# EAGLE board SparkFun_LilyPad_Main_Board-Panel-v21 (EAGLE 7.4.0), part 1 of 2
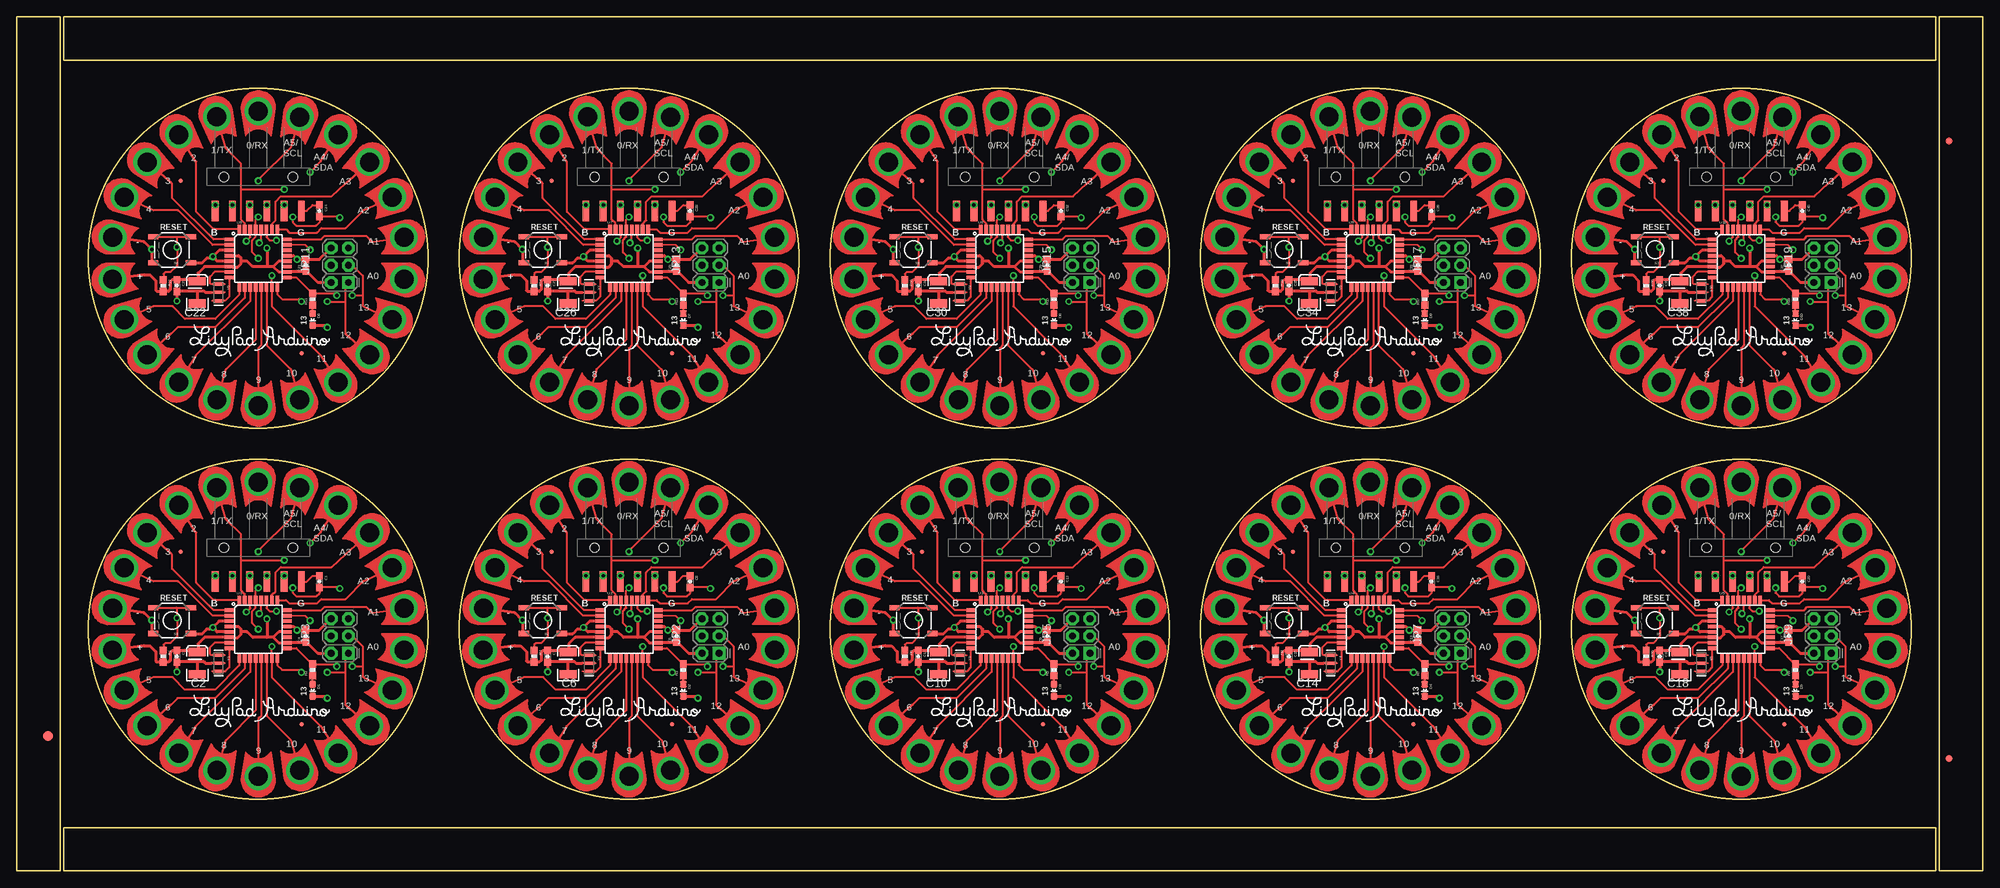
[diagram p0: board, top side]
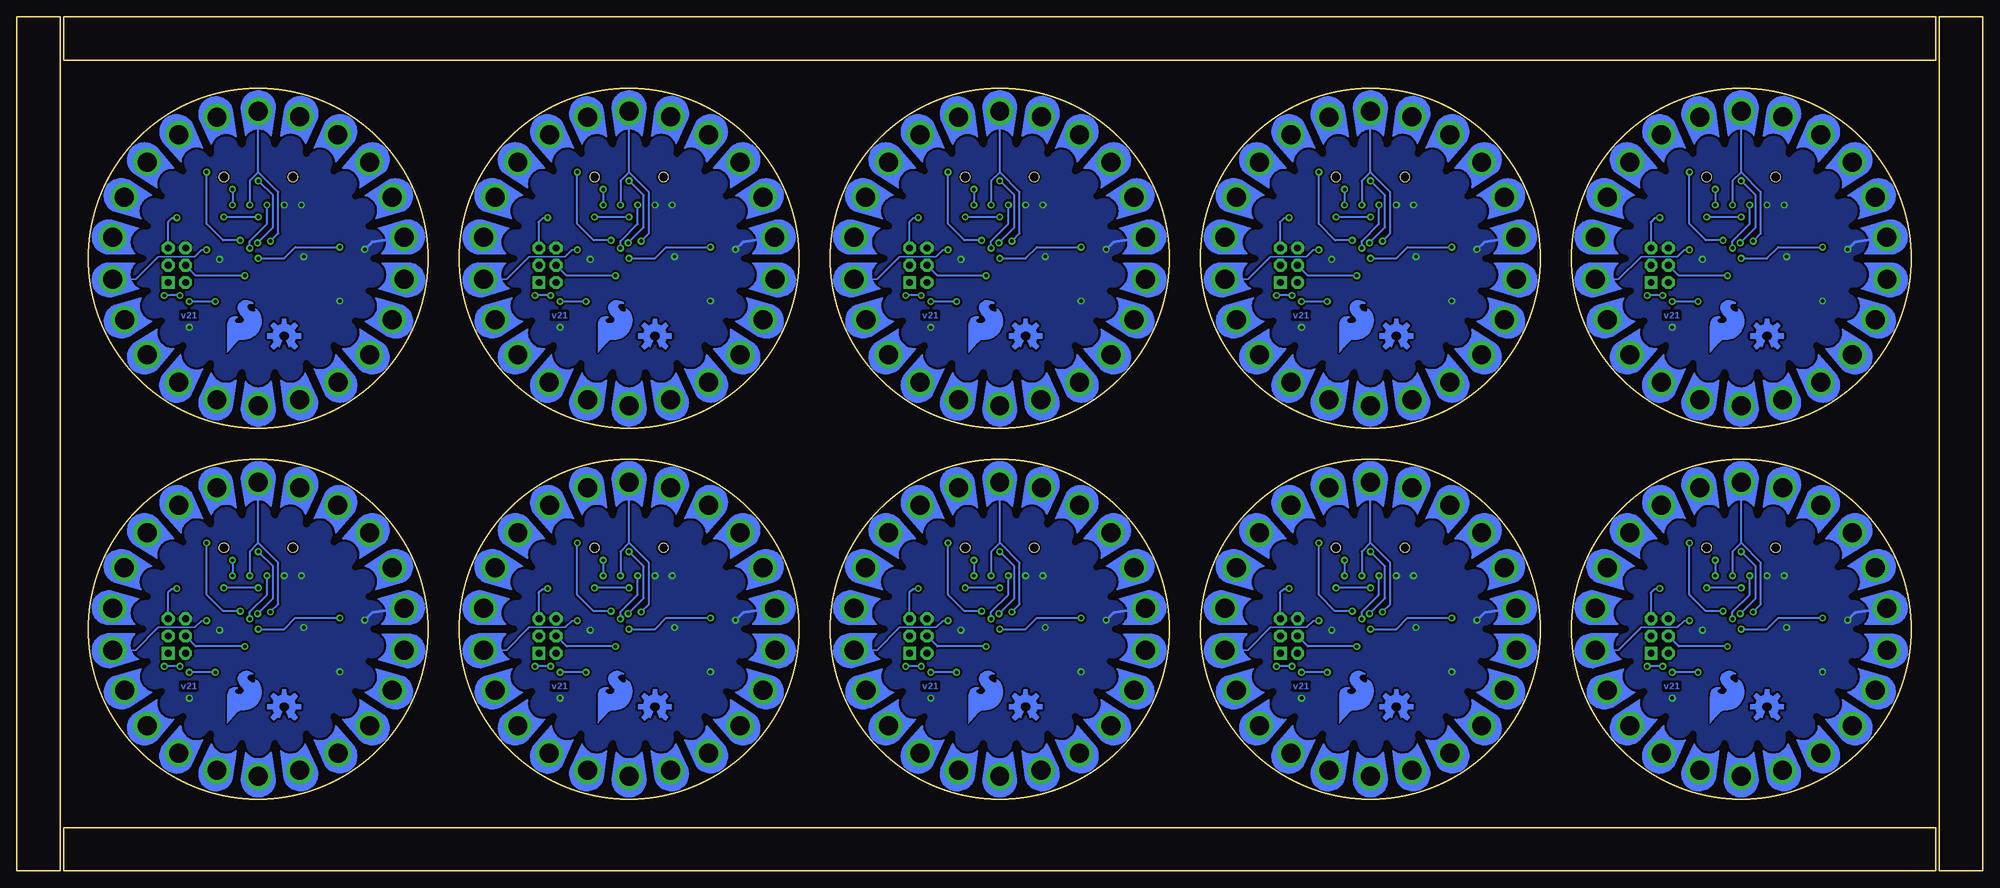
[diagram p1: board, bottom side, seen from below]

Size 289.56 x 125.73 mm. Coordinates in mm from the lower left corner, seen from the top.
Outline: 6.35,81.28 6.35,0 0,0 0,31.75
Outline: 0,29.21 0,125.73 6.35,125.73 6.35,78.74
Outline: 80.01,0 6.86,0 6.86,6.35 30.48,6.35
Outline: 27.94,6.35 282.7,6.35 282.7,0 77.47,0
Outline: 208.28,125.73 282.7,125.73 282.7,119.38 257.81,119.38
Outline: 260.35,119.38 6.86,119.38 6.86,125.73 210.82,125.73
Outline: 283.21,45.72 283.21,125.73 289.56,125.73 289.56,95.25
Outline: 289.56,97.79 289.56,0 283.21,0 283.21,48.26
Outline: circle at 35.56,35.56 radius 25
Outline: circle at 90.17,35.56 radius 25
Outline: circle at 144.78,35.56 radius 25
Outline: circle at 199.39,35.56 radius 25
Outline: circle at 254,35.56 radius 25
Outline: circle at 35.56,90.17 radius 25
Outline: circle at 90.17,90.17 radius 25
Outline: circle at 144.78,90.17 radius 25
Outline: circle at 199.39,90.17 radius 25
Outline: circle at 254,90.17 radius 25
Copper layers (1*16): Top 0.035mm / dielectric 1.5mm / Bottom 0.035mm
Design rules "SparkFun-2-layer": minimum track width 7mil, minimum drill 15mil, track to track 8mil, track to pad 8mil, pad to pad 8mil, via to via 8mil, smd to smd 8mil, copper to edge 8mil, drill to drill 8mil, minimum pad ring 12mil, minimum via ring 10mil, stop-mask expansion 4mil, vias tented up to drill 20mil, thermal gap 10mil
Net classes: 0 Default: width 0.203 mm; 1 VCC: width 0.305 mm
bRestrict: area 13,13 to 58.1,58.1; area 31.6,53.4 to 34.1,54.6; area 42.2,51.9 to 45,53.6; area 46.9,49 to 49.5,51.3; area 50.6,44.7 to 52.6,47.5; area 52.8,39.8 to 54.2,42.4; area 53.4,34.5 to 54.6,36.8; area 52.8,28.8 to 54.3,31.5; area 46.9,20 to 49.6,22.3; area 42.3,17.6 to 45.1,19.3; area 37.1,16.6 to 39.5,17.9; area 31.7,16.6 to 34.2,17.9; 218 more areas; 220 lines

## Footprints (pad centres in the part's own frame; a part is rotated, then mirrored left to right if it is on the bottom)
0603-CAP = smd 1.1 x 1: 1 -0.85,0; 2 0.85,0
EIA3528 = smd 1.2 x 2.5: A 1.65,0; C -1.65,0
LED-0603 = smd 1 x 1: A 0,-0.877; C 0,0.877
FIDUCIAL-1.5X3 = smd 1.5 x 1.5: 1 0,0
FIDUCIAL-1X2 = smd 1 x 1: 1 0,0
MICRO-FIDUCIAL = smd 0.635 x 0.635: 1 0,0
PETAL-LONG-1-2SIDE = drill 2.794 pad 4.064: 1 0.03,0
1X06-SMD = smd 1 x 3: 1 -6.35,5; 2 -3.81,5; 3 -1.27,5; 4 1.27,5; 5 3.81,5; 6 6.35,5 | hole 1.4: -5.08,0; 5.08,0
2X3-NS = drill 1.016 pad 1.88 square: 1 -2.54,-1.27 | drill 1.016 pad 1.88 octagon: 2 -2.54,1.27; 3 0,-1.27; 4 0,1.27; 5 2.54,-1.27; 6 2.54,1.27
0603-RES = smd 1.1 x 1: 1 -0.85,0; 2 0.85,0
TACTILE-SWITCH-SMD = smd 1.524 x 0.762: 1 -2.794,1.905; 2 2.794,1.905; 3 -2.794,-1.905; 4 2.794,-1.905
TQFP32-08 = smd 1.27 x 0.559: 1 -4.293,2.8; 2 -4.293,2; 3 -4.293,1.2; 4 -4.293,0.4; 5 -4.293,-0.4; 6 -4.293,-1.2; 7 -4.293,-2; 8 -4.293,-2.8; 17 4.293,-2.8; 18 4.293,-2; 19 4.293,-1.2; 20 4.293,-0.4; 21 4.293,0.4; 22 4.293,1.2; 23 4.293,2; 24 4.293,2.8 | smd 0.559 x 1.27: 9 -2.8,-4.293; 10 -2,-4.293; 11 -1.2,-4.293; 12 -0.4,-4.293; 13 0.4,-4.293; 14 1.2,-4.293; 15 2,-4.293; 16 2.8,-4.293; 25 2.8,4.293; 26 2,4.293; 27 1.2,4.293; 28 0.4,4.293; 29 -0.4,4.293; 30 -1.2,4.293; 31 -2,4.293; 32 -2.8,4.293
RESONATOR-SMD = smd 0.45 x 1.905: 1 -1.2,0; 2 0,0; 3 1.2,0

## Placement (x,y rotation side)
$0000001  LOGO-LPLPA  [LOGO-LPA]  90.17,23.86 0 top
$0000002  LOGO-LPLPA  [LOGO-LPA]  144.78,23.86 0 top
$0000003  LOGO-LPLPA  [LOGO-LPA]  35.56,23.86 0 top
$0000004  LOGO-LPLPA  [LOGO-LPA]  199.39,23.86 0 top
$0000005  LOGO-LPLPA  [LOGO-LPA]  254,23.86 0 top
$0000006  LOGO-LPLPA  [LOGO-LPA]  35.56,78.47 0 top
$0000007  LOGO-LPLPA  [LOGO-LPA]  90.17,78.47 0 top
$0000008  LOGO-LPLPA  [LOGO-LPA]  144.78,78.47 0 top
$0000009  LOGO-LPLPA  [LOGO-LPA]  199.39,78.47 0 top
$0000010  LOGO-LPLPA  [LOGO-LPA]  254,78.47 0 top
C1  0.1uF  [0603-CAP]  44.56,42.56 270 top
C2  47uF  [EIA3528]  26.56,30.56 90 top
C3  1.0uF  [0603-CAP]  23.56,31.56 270 top
C4  0.1uF  [0603-CAP]  42.56,34.56 90 top
C5  0.1uF  [0603-CAP]  97.17,34.56 90 top
C6  47uF  [EIA3528]  81.17,30.56 90 top
C7  1.0uF  [0603-CAP]  78.17,31.56 270 top
C8  0.1uF  [0603-CAP]  99.17,42.56 270 top
C9  0.1uF  [0603-CAP]  151.78,34.56 90 top
C10  47uF  [EIA3528]  135.78,30.56 90 top
C11  1.0uF  [0603-CAP]  132.78,31.56 270 top
C12  0.1uF  [0603-CAP]  153.78,42.56 270 top
C13  0.1uF  [0603-CAP]  206.39,34.56 90 top
C14  47uF  [EIA3528]  190.39,30.56 90 top
C15  1.0uF  [0603-CAP]  187.39,31.56 270 top
C16  0.1uF  [0603-CAP]  208.39,42.56 270 top
C17  0.1uF  [0603-CAP]  261,34.56 90 top
C18  47uF  [EIA3528]  245,30.56 90 top
C19  1.0uF  [0603-CAP]  242,31.56 270 top
C20  0.1uF  [0603-CAP]  263,42.56 270 top
C21  0.1uF  [0603-CAP]  42.56,89.17 90 top
C22  47uF  [EIA3528]  26.56,85.17 90 top
C23  1.0uF  [0603-CAP]  23.56,86.17 270 top
C24  0.1uF  [0603-CAP]  44.56,97.17 270 top
C25  0.1uF  [0603-CAP]  97.17,89.17 90 top
C26  47uF  [EIA3528]  81.17,85.17 90 top
C27  1.0uF  [0603-CAP]  78.17,86.17 270 top
C28  0.1uF  [0603-CAP]  99.17,97.17 270 top
C29  0.1uF  [0603-CAP]  151.78,89.17 90 top
C30  47uF  [EIA3528]  135.78,85.17 90 top
C31  1.0uF  [0603-CAP]  132.78,86.17 270 top
C32  0.1uF  [0603-CAP]  153.78,97.17 270 top
C33  0.1uF  [0603-CAP]  206.39,89.17 90 top
C34  47uF  [EIA3528]  190.39,85.17 90 top
C35  1.0uF  [0603-CAP]  187.39,86.17 270 top
C36  0.1uF  [0603-CAP]  208.39,97.17 270 top
C37  0.1uF  [0603-CAP]  261,89.17 90 top
C38  47uF  [EIA3528]  245,85.17 90 top
C39  1.0uF  [0603-CAP]  242,86.17 270 top
C40  0.1uF  [0603-CAP]  263,97.17 270 top
D1  BLUE  [LED-0603]  43.56,26.56 180 top
D2  BLUE  [LED-0603]  98.17,26.56 180 top
D3  BLUE  [LED-0603]  152.78,26.56 180 top
D4  BLUE  [LED-0603]  207.39,26.56 180 top
D5  BLUE  [LED-0603]  262,26.56 180 top
D6  BLUE  [LED-0603]  43.56,81.17 180 top
D7  BLUE  [LED-0603]  98.17,81.17 180 top
D8  BLUE  [LED-0603]  152.78,81.17 180 top
D9  BLUE  [LED-0603]  207.39,81.17 180 top
D10  BLUE  [LED-0603]  262,81.17 180 top
E$1  [FIDUCIAL-1.5X3]  4.57,19.81 0 top
E$7  [FIDUCIAL-1X2]  284.61,107.44 180 top
E$8  [FIDUCIAL-1X2]  284.61,16.51 0 top
FID1  FIDUCIALUFIDUCIAL  [MICRO-FIDUCIAL]  24.13,46.99 0 top
FID2  FIDUCIALUFIDUCIAL  [MICRO-FIDUCIAL]  41.91,21.59 0 top
FID3  FIDUCIALUFIDUCIAL  [MICRO-FIDUCIAL]  78.74,46.99 0 top
FID4  FIDUCIALUFIDUCIAL  [MICRO-FIDUCIAL]  96.52,21.59 0 top
FID5  FIDUCIALUFIDUCIAL  [MICRO-FIDUCIAL]  133.35,46.99 0 top
FID6  FIDUCIALUFIDUCIAL  [MICRO-FIDUCIAL]  151.13,21.59 0 top
FID7  FIDUCIALUFIDUCIAL  [MICRO-FIDUCIAL]  187.96,46.99 0 top
FID8  FIDUCIALUFIDUCIAL  [MICRO-FIDUCIAL]  205.74,21.59 0 top
FID9  FIDUCIALUFIDUCIAL  [MICRO-FIDUCIAL]  242.57,46.99 0 top
FID10  FIDUCIALUFIDUCIAL  [MICRO-FIDUCIAL]  260.35,21.59 0 top
FID11  FIDUCIALUFIDUCIAL  [MICRO-FIDUCIAL]  24.13,101.6 0 top
FID12  FIDUCIALUFIDUCIAL  [MICRO-FIDUCIAL]  41.91,76.2 0 top
FID13  FIDUCIALUFIDUCIAL  [MICRO-FIDUCIAL]  78.74,101.6 0 top
FID14  FIDUCIALUFIDUCIAL  [MICRO-FIDUCIAL]  96.52,76.2 0 top
FID15  FIDUCIALUFIDUCIAL  [MICRO-FIDUCIAL]  133.35,101.6 0 top
FID16  FIDUCIALUFIDUCIAL  [MICRO-FIDUCIAL]  151.13,76.2 0 top
FID17  FIDUCIALUFIDUCIAL  [MICRO-FIDUCIAL]  187.96,101.6 0 top
FID18  FIDUCIALUFIDUCIAL  [MICRO-FIDUCIAL]  205.74,76.2 0 top
FID19  FIDUCIALUFIDUCIAL  [MICRO-FIDUCIAL]  242.57,101.6 0 top
FID20  FIDUCIALUFIDUCIAL  [MICRO-FIDUCIAL]  260.35,76.2 0 top
GND  SEWTAP9  [PETAL-LONG-1-2SIDE]  14.08,38.65 351.8 top
GND1  SEWTAP9  [PETAL-LONG-1-2SIDE]  68.69,38.65 351.8 top
GND2  SEWTAP9  [PETAL-LONG-1-2SIDE]  123.3,38.65 351.8 top
GND3  SEWTAP9  [PETAL-LONG-1-2SIDE]  177.91,38.65 351.8 top
GND4  SEWTAP9  [PETAL-LONG-1-2SIDE]  232.52,38.65 351.8 top
GND5  SEWTAP9  [PETAL-LONG-1-2SIDE]  14.08,93.26 351.8 top
GND6  SEWTAP9  [PETAL-LONG-1-2SIDE]  68.69,93.26 351.8 top
GND7  SEWTAP9  [PETAL-LONG-1-2SIDE]  123.3,93.26 351.8 top
GND8  SEWTAP9  [PETAL-LONG-1-2SIDE]  177.91,93.26 351.8 top
GND9  SEWTAP9  [PETAL-LONG-1-2SIDE]  232.52,93.26 351.8 top
JP1  [1X06-SMD]  35.56,47.56 180 top
JP2  FEMALE 2x3  [2X3-NS]  102.17,34.56 90 top
JP3  FEMALE 2x3  [2X3-NS]  47.56,34.56 90 top
JP4  [1X06-SMD]  90.17,47.56 180 top
JP5  FEMALE 2x3  [2X3-NS]  156.78,34.56 90 top
JP6  [1X06-SMD]  144.78,47.56 180 top
JP7  FEMALE 2x3  [2X3-NS]  211.39,34.56 90 top
JP8  [1X06-SMD]  199.39,47.56 180 top
JP9  FEMALE 2x3  [2X3-NS]  266,34.56 90 top
JP10  [1X06-SMD]  254,47.56 180 top
JP11  FEMALE 2x3  [2X3-NS]  47.56,89.17 90 top
JP12  [1X06-SMD]  35.56,102.17 180 top
JP13  FEMALE 2x3  [2X3-NS]  102.17,89.17 90 top
JP14  [1X06-SMD]  90.17,102.17 180 top
JP15  FEMALE 2x3  [2X3-NS]  156.78,89.17 90 top
JP16  [1X06-SMD]  144.78,102.17 180 top
JP17  FEMALE 2x3  [2X3-NS]  211.39,89.17 90 top
JP18  [1X06-SMD]  199.39,102.17 180 top
JP19  FEMALE 2x3  [2X3-NS]  266,89.17 90 top
JP20  [1X06-SMD]  254,102.17 180 top
LOGO1  SFE_LOGO_FLAME.3COP  [SFE_LOGO_FLAME_COPPER_.3]  40.64,21.59 0 bottom
LOGO2  OSHW-LOGO-COPPERM  [OSHW-LOGO-M]  31.75,24.13 0 bottom
LOGO3  SFE_LOGO_FLAME.3COP  [SFE_LOGO_FLAME_COPPER_.3]  95.25,21.59 0 bottom
LOGO4  OSHW-LOGO-COPPERM  [OSHW-LOGO-M]  86.36,24.13 0 bottom
LOGO5  SFE_LOGO_FLAME.3COP  [SFE_LOGO_FLAME_COPPER_.3]  149.86,21.59 0 bottom
LOGO6  OSHW-LOGO-COPPERM  [OSHW-LOGO-M]  140.97,24.13 0 bottom
LOGO7  SFE_LOGO_FLAME.3COP  [SFE_LOGO_FLAME_COPPER_.3]  204.47,21.59 0 bottom
LOGO8  OSHW-LOGO-COPPERM  [OSHW-LOGO-M]  195.58,24.13 0 bottom
LOGO9  SFE_LOGO_FLAME.3COP  [SFE_LOGO_FLAME_COPPER_.3]  259.08,21.59 0 bottom
LOGO10  OSHW-LOGO-COPPERM  [OSHW-LOGO-M]  250.19,24.13 0 bottom
LOGO11  SFE_LOGO_FLAME.3COP  [SFE_LOGO_FLAME_COPPER_.3]  40.64,76.2 0 bottom
LOGO12  OSHW-LOGO-COPPERM  [OSHW-LOGO-M]  31.75,78.74 0 bottom
LOGO13  SFE_LOGO_FLAME.3COP  [SFE_LOGO_FLAME_COPPER_.3]  95.25,76.2 0 bottom
LOGO14  OSHW-LOGO-COPPERM  [OSHW-LOGO-M]  86.36,78.74 0 bottom
LOGO15  SFE_LOGO_FLAME.3COP  [SFE_LOGO_FLAME_COPPER_.3]  149.86,76.2 0 bottom
LOGO16  OSHW-LOGO-COPPERM  [OSHW-LOGO-M]  140.97,78.74 0 bottom
LOGO17  SFE_LOGO_FLAME.3COP  [SFE_LOGO_FLAME_COPPER_.3]  204.47,76.2 0 bottom
LOGO18  OSHW-LOGO-COPPERM  [OSHW-LOGO-M]  195.58,78.74 0 bottom
LOGO19  SFE_LOGO_FLAME.3COP  [SFE_LOGO_FLAME_COPPER_.3]  259.08,76.2 0 bottom
LOGO20  OSHW-LOGO-COPPERM  [OSHW-LOGO-M]  250.19,78.74 0 bottom
R1  10K  [0603-RES]  21.56,31.56 270 top
R2  330  [0603-RES]  43.56,29.56 90 top
R3  330  [0603-RES]  98.17,29.56 90 top
R4  10K  [0603-RES]  76.17,31.56 270 top
R5  330  [0603-RES]  152.78,29.56 90 top
R6  10K  [0603-RES]  130.78,31.56 270 top
R7  330  [0603-RES]  207.39,29.56 90 top
R8  10K  [0603-RES]  185.39,31.56 270 top
R9  330  [0603-RES]  262,29.56 90 top
R10  10K  [0603-RES]  240,31.56 270 top
R11  330  [0603-RES]  43.56,84.17 90 top
R12  10K  [0603-RES]  21.56,86.17 270 top
R13  330  [0603-RES]  98.17,84.17 90 top
R14  10K  [0603-RES]  76.17,86.17 270 top
R15  330  [0603-RES]  152.78,84.17 90 top
R16  10K  [0603-RES]  130.78,86.17 270 top
R17  330  [0603-RES]  207.39,84.17 90 top
R18  10K  [0603-RES]  185.39,86.17 270 top
R19  330  [0603-RES]  262,84.17 90 top
R20  10K  [0603-RES]  240,86.17 270 top
S1  SWITCH-MOMENTARY-2SMD-REDUNDANT  [TACTILE-SWITCH-SMD]  22.86,36.83 180 top
S2  SWITCH-MOMENTARY-2SMD-REDUNDANT  [TACTILE-SWITCH-SMD]  77.47,36.83 180 top
S3  SWITCH-MOMENTARY-2SMD-REDUNDANT  [TACTILE-SWITCH-SMD]  132.08,36.83 180 top
S4  SWITCH-MOMENTARY-2SMD-REDUNDANT  [TACTILE-SWITCH-SMD]  186.69,36.83 180 top
S5  SWITCH-MOMENTARY-2SMD-REDUNDANT  [TACTILE-SWITCH-SMD]  241.3,36.83 180 top
S6  SWITCH-MOMENTARY-2SMD-REDUNDANT  [TACTILE-SWITCH-SMD]  22.86,91.44 180 top
S7  SWITCH-MOMENTARY-2SMD-REDUNDANT  [TACTILE-SWITCH-SMD]  77.47,91.44 180 top
S8  SWITCH-MOMENTARY-2SMD-REDUNDANT  [TACTILE-SWITCH-SMD]  132.08,91.44 180 top
S9  SWITCH-MOMENTARY-2SMD-REDUNDANT  [TACTILE-SWITCH-SMD]  186.69,91.44 180 top
S10  SWITCH-MOMENTARY-2SMD-REDUNDANT  [TACTILE-SWITCH-SMD]  241.3,91.44 180 top
U1  ATMEGA328P_TQFP  [TQFP32-08]  35.56,35.56 0 top
U2  ATMEGA328P_TQFP  [TQFP32-08]  90.17,35.56 0 top
U3  ATMEGA328P_TQFP  [TQFP32-08]  144.78,35.56 0 top
U4  ATMEGA328P_TQFP  [TQFP32-08]  199.39,35.56 0 top
U5  ATMEGA328P_TQFP  [TQFP32-08]  254,35.56 0 top
U6  ATMEGA328P_TQFP  [TQFP32-08]  35.56,90.17 0 top
U7  ATMEGA328P_TQFP  [TQFP32-08]  90.17,90.17 0 top
U8  ATMEGA328P_TQFP  [TQFP32-08]  144.78,90.17 0 top
U9  ATMEGA328P_TQFP  [TQFP32-08]  199.39,90.17 0 top
U10  ATMEGA328P_TQFP  [TQFP32-08]  254,90.17 0 top
U$1  SEWTAP9  [PETAL-LONG-1-2SIDE]  57.04,32.47 171.8 top
U$2  SEWTAP9  [PETAL-LONG-1-2SIDE]  57.04,38.65 188.2 top
U$3  SEWTAP9  [PETAL-LONG-1-2SIDE]  55.33,44.6 204.5 top
U$4  SEWTAP9  [PETAL-LONG-1-2SIDE]  51.96,49.77 220.9 top
U$5  SEWTAP9  [PETAL-LONG-1-2SIDE]  47.3,53.82 237.3 top
U$6  SEWTAP9  [PETAL-LONG-1-2SIDE]  41.67,56.39 253.7 top
U$7  SEWTAP9  [PETAL-LONG-1-2SIDE]  35.56,57.26 270 top
U$8  SEWTAP9  [PETAL-LONG-1-2SIDE]  29.43,56.45 286.3 top
U$9  SEWTAP9  [PETAL-LONG-1-2SIDE]  23.83,53.82 302.7 top
U$10  SEWTAP9  [PETAL-LONG-1-2SIDE]  19.16,49.77 319.1 top
U$11  SEWTAP9  [PETAL-LONG-1-2SIDE]  15.79,44.59 335.5 top
U$12  SEWTAP9  [PETAL-LONG-1-2SIDE]  15.79,26.53 24.5 top
U$13  SEWTAP9  [PETAL-LONG-1-2SIDE]  19.16,21.35 40.9 top
U$14  SEWTAP9  [PETAL-LONG-1-2SIDE]  23.82,17.3 57.3 top
U$15  SEWTAP9  [PETAL-LONG-1-2SIDE]  29.45,14.73 73.7 top
U$16  SEWTAP9  [PETAL-LONG-1-2SIDE]  35.56,13.86 90 top
U$17  SEWTAP9  [PETAL-LONG-1-2SIDE]  41.67,14.73 106.3 top
U$18  SEWTAP9  [PETAL-LONG-1-2SIDE]  47.32,17.28 122.7 top
U$19  SEWTAP9  [PETAL-LONG-1-2SIDE]  51.96,21.35 139.1 top
U$20  SEWTAP9  [PETAL-LONG-1-2SIDE]  14.04,32.46 8.2 top
U$21  SEWTAP9  [PETAL-LONG-1-2SIDE]  55.3,26.54 155.5 top
U$22  SEWTAP9  [PETAL-LONG-1-2SIDE]  111.65,38.65 188.2 top
U$23  SEWTAP9  [PETAL-LONG-1-2SIDE]  109.94,44.6 204.5 top
U$24  SEWTAP9  [PETAL-LONG-1-2SIDE]  106.57,49.77 220.9 top
U$25  SEWTAP9  [PETAL-LONG-1-2SIDE]  101.91,53.82 237.3 top
U$26  SEWTAP9  [PETAL-LONG-1-2SIDE]  96.28,56.39 253.7 top
U$27  SEWTAP9  [PETAL-LONG-1-2SIDE]  84.06,14.73 73.7 top
U$28  SEWTAP9  [PETAL-LONG-1-2SIDE]  90.17,13.86 90 top
U$29  SEWTAP9  [PETAL-LONG-1-2SIDE]  96.28,14.73 106.3 top
U$30  SEWTAP9  [PETAL-LONG-1-2SIDE]  101.93,17.28 122.7 top
U$31  SEWTAP9  [PETAL-LONG-1-2SIDE]  106.57,21.35 139.1 top
U$32  SEWTAP9  [PETAL-LONG-1-2SIDE]  109.91,26.54 155.5 top
U$33  SEWTAP9  [PETAL-LONG-1-2SIDE]  73.77,21.35 40.9 top
U$34  SEWTAP9  [PETAL-LONG-1-2SIDE]  70.4,26.53 24.5 top
U$35  SEWTAP9  [PETAL-LONG-1-2SIDE]  70.4,44.59 335.5 top
U$36  SEWTAP9  [PETAL-LONG-1-2SIDE]  73.77,49.77 319.1 top
U$37  SEWTAP9  [PETAL-LONG-1-2SIDE]  78.44,53.82 302.7 top
U$38  SEWTAP9  [PETAL-LONG-1-2SIDE]  84.04,56.45 286.3 top
U$39  SEWTAP9  [PETAL-LONG-1-2SIDE]  90.17,57.26 270 top
U$40  SEWTAP9  [PETAL-LONG-1-2SIDE]  78.43,17.3 57.3 top
U$41  SEWTAP9  [PETAL-LONG-1-2SIDE]  68.65,32.46 8.2 top
U$42  SEWTAP9  [PETAL-LONG-1-2SIDE]  111.65,32.47 171.8 top
U$43  SEWTAP9  [PETAL-LONG-1-2SIDE]  166.26,38.65 188.2 top
U$44  SEWTAP9  [PETAL-LONG-1-2SIDE]  164.55,44.6 204.5 top
U$45  SEWTAP9  [PETAL-LONG-1-2SIDE]  161.18,49.77 220.9 top
U$46  SEWTAP9  [PETAL-LONG-1-2SIDE]  156.52,53.82 237.3 top
U$47  SEWTAP9  [PETAL-LONG-1-2SIDE]  150.89,56.39 253.7 top
U$48  SEWTAP9  [PETAL-LONG-1-2SIDE]  138.67,14.73 73.7 top
U$49  SEWTAP9  [PETAL-LONG-1-2SIDE]  144.78,13.86 90 top
U$50  SEWTAP9  [PETAL-LONG-1-2SIDE]  150.89,14.73 106.3 top
U$51  SEWTAP9  [PETAL-LONG-1-2SIDE]  156.54,17.28 122.7 top
U$52  SEWTAP9  [PETAL-LONG-1-2SIDE]  161.18,21.35 139.1 top
U$53  SEWTAP9  [PETAL-LONG-1-2SIDE]  164.52,26.54 155.5 top
U$54  SEWTAP9  [PETAL-LONG-1-2SIDE]  128.38,21.35 40.9 top
U$55  SEWTAP9  [PETAL-LONG-1-2SIDE]  125.01,26.53 24.5 top
U$56  SEWTAP9  [PETAL-LONG-1-2SIDE]  125.01,44.59 335.5 top
U$57  SEWTAP9  [PETAL-LONG-1-2SIDE]  128.38,49.77 319.1 top
U$58  SEWTAP9  [PETAL-LONG-1-2SIDE]  133.05,53.82 302.7 top
U$59  SEWTAP9  [PETAL-LONG-1-2SIDE]  138.65,56.45 286.3 top
U$60  SEWTAP9  [PETAL-LONG-1-2SIDE]  144.78,57.26 270 top
U$61  SEWTAP9  [PETAL-LONG-1-2SIDE]  133.04,17.3 57.3 top
U$62  SEWTAP9  [PETAL-LONG-1-2SIDE]  123.26,32.46 8.2 top
U$63  SEWTAP9  [PETAL-LONG-1-2SIDE]  166.26,32.47 171.8 top
U$64  SEWTAP9  [PETAL-LONG-1-2SIDE]  220.87,38.65 188.2 top
U$65  SEWTAP9  [PETAL-LONG-1-2SIDE]  219.16,44.6 204.5 top
U$66  SEWTAP9  [PETAL-LONG-1-2SIDE]  215.79,49.77 220.9 top
U$67  SEWTAP9  [PETAL-LONG-1-2SIDE]  211.13,53.82 237.3 top
U$68  SEWTAP9  [PETAL-LONG-1-2SIDE]  205.5,56.39 253.7 top
U$69  SEWTAP9  [PETAL-LONG-1-2SIDE]  193.28,14.73 73.7 top
U$70  SEWTAP9  [PETAL-LONG-1-2SIDE]  199.39,13.86 90 top
U$71  SEWTAP9  [PETAL-LONG-1-2SIDE]  205.5,14.73 106.3 top
U$72  SEWTAP9  [PETAL-LONG-1-2SIDE]  211.15,17.28 122.7 top
U$73  SEWTAP9  [PETAL-LONG-1-2SIDE]  215.79,21.35 139.1 top
U$74  SEWTAP9  [PETAL-LONG-1-2SIDE]  219.13,26.54 155.5 top
U$75  SEWTAP9  [PETAL-LONG-1-2SIDE]  182.99,21.35 40.9 top
U$76  SEWTAP9  [PETAL-LONG-1-2SIDE]  179.62,26.53 24.5 top
U$77  SEWTAP9  [PETAL-LONG-1-2SIDE]  179.62,44.59 335.5 top
U$78  SEWTAP9  [PETAL-LONG-1-2SIDE]  182.99,49.77 319.1 top
U$79  SEWTAP9  [PETAL-LONG-1-2SIDE]  187.66,53.82 302.7 top
U$80  SEWTAP9  [PETAL-LONG-1-2SIDE]  193.26,56.45 286.3 top
U$81  SEWTAP9  [PETAL-LONG-1-2SIDE]  199.39,57.26 270 top
U$82  SEWTAP9  [PETAL-LONG-1-2SIDE]  187.65,17.3 57.3 top
U$83  SEWTAP9  [PETAL-LONG-1-2SIDE]  177.87,32.46 8.2 top
U$84  SEWTAP9  [PETAL-LONG-1-2SIDE]  220.87,32.47 171.8 top
U$85  SEWTAP9  [PETAL-LONG-1-2SIDE]  275.48,38.65 188.2 top
U$86  SEWTAP9  [PETAL-LONG-1-2SIDE]  273.77,44.6 204.5 top
U$87  SEWTAP9  [PETAL-LONG-1-2SIDE]  270.4,49.77 220.9 top
U$88  SEWTAP9  [PETAL-LONG-1-2SIDE]  265.74,53.82 237.3 top
U$89  SEWTAP9  [PETAL-LONG-1-2SIDE]  260.11,56.39 253.7 top
U$90  SEWTAP9  [PETAL-LONG-1-2SIDE]  247.89,14.73 73.7 top
U$91  SEWTAP9  [PETAL-LONG-1-2SIDE]  254,13.86 90 top
U$92  SEWTAP9  [PETAL-LONG-1-2SIDE]  260.11,14.73 106.3 top
U$93  SEWTAP9  [PETAL-LONG-1-2SIDE]  265.76,17.28 122.7 top
U$94  SEWTAP9  [PETAL-LONG-1-2SIDE]  270.4,21.35 139.1 top
U$95  SEWTAP9  [PETAL-LONG-1-2SIDE]  273.74,26.54 155.5 top
U$96  SEWTAP9  [PETAL-LONG-1-2SIDE]  237.6,21.35 40.9 top
U$97  SEWTAP9  [PETAL-LONG-1-2SIDE]  234.23,26.53 24.5 top
U$98  SEWTAP9  [PETAL-LONG-1-2SIDE]  234.23,44.59 335.5 top
U$99  SEWTAP9  [PETAL-LONG-1-2SIDE]  237.6,49.77 319.1 top
U$100  SEWTAP9  [PETAL-LONG-1-2SIDE]  242.27,53.82 302.7 top
U$101  SEWTAP9  [PETAL-LONG-1-2SIDE]  247.87,56.45 286.3 top
U$102  SEWTAP9  [PETAL-LONG-1-2SIDE]  254,57.26 270 top
U$103  SEWTAP9  [PETAL-LONG-1-2SIDE]  242.26,17.3 57.3 top
U$104  SEWTAP9  [PETAL-LONG-1-2SIDE]  232.48,32.46 8.2 top
U$105  SEWTAP9  [PETAL-LONG-1-2SIDE]  275.48,32.47 171.8 top
U$106  SEWTAP9  [PETAL-LONG-1-2SIDE]  57.04,93.26 188.2 top
U$107  SEWTAP9  [PETAL-LONG-1-2SIDE]  55.33,99.21 204.5 top
U$108  SEWTAP9  [PETAL-LONG-1-2SIDE]  51.96,104.38 220.9 top
U$109  SEWTAP9  [PETAL-LONG-1-2SIDE]  47.3,108.43 237.3 top
U$110  SEWTAP9  [PETAL-LONG-1-2SIDE]  41.67,111 253.7 top
U$111  SEWTAP9  [PETAL-LONG-1-2SIDE]  29.45,69.34 73.7 top
U$112  SEWTAP9  [PETAL-LONG-1-2SIDE]  35.56,68.47 90 top
U$113  SEWTAP9  [PETAL-LONG-1-2SIDE]  41.67,69.34 106.3 top
U$114  SEWTAP9  [PETAL-LONG-1-2SIDE]  47.32,71.89 122.7 top
U$115  SEWTAP9  [PETAL-LONG-1-2SIDE]  51.96,75.96 139.1 top
U$116  SEWTAP9  [PETAL-LONG-1-2SIDE]  55.3,81.15 155.5 top
U$117  SEWTAP9  [PETAL-LONG-1-2SIDE]  19.16,75.96 40.9 top
U$118  SEWTAP9  [PETAL-LONG-1-2SIDE]  15.79,81.14 24.5 top
U$119  SEWTAP9  [PETAL-LONG-1-2SIDE]  15.79,99.2 335.5 top
U$120  SEWTAP9  [PETAL-LONG-1-2SIDE]  19.16,104.38 319.1 top
U$121  SEWTAP9  [PETAL-LONG-1-2SIDE]  23.83,108.43 302.7 top
U$122  SEWTAP9  [PETAL-LONG-1-2SIDE]  29.43,111.06 286.3 top
U$123  SEWTAP9  [PETAL-LONG-1-2SIDE]  35.56,111.87 270 top
U$124  SEWTAP9  [PETAL-LONG-1-2SIDE]  23.82,71.91 57.3 top
U$125  SEWTAP9  [PETAL-LONG-1-2SIDE]  14.04,87.07 8.2 top
U$126  SEWTAP9  [PETAL-LONG-1-2SIDE]  57.04,87.08 171.8 top
U$127  SEWTAP9  [PETAL-LONG-1-2SIDE]  111.65,93.26 188.2 top
U$128  SEWTAP9  [PETAL-LONG-1-2SIDE]  109.94,99.21 204.5 top
U$129  SEWTAP9  [PETAL-LONG-1-2SIDE]  106.57,104.38 220.9 top
U$130  SEWTAP9  [PETAL-LONG-1-2SIDE]  101.91,108.43 237.3 top
U$131  SEWTAP9  [PETAL-LONG-1-2SIDE]  96.28,111 253.7 top
U$132  SEWTAP9  [PETAL-LONG-1-2SIDE]  84.06,69.34 73.7 top
U$133  SEWTAP9  [PETAL-LONG-1-2SIDE]  90.17,68.47 90 top
U$134  SEWTAP9  [PETAL-LONG-1-2SIDE]  96.28,69.34 106.3 top
U$135  SEWTAP9  [PETAL-LONG-1-2SIDE]  101.93,71.89 122.7 top
U$136  SEWTAP9  [PETAL-LONG-1-2SIDE]  106.57,75.96 139.1 top
U$137  SEWTAP9  [PETAL-LONG-1-2SIDE]  109.91,81.15 155.5 top
U$138  SEWTAP9  [PETAL-LONG-1-2SIDE]  73.77,75.96 40.9 top
U$139  SEWTAP9  [PETAL-LONG-1-2SIDE]  70.4,81.14 24.5 top
U$140  SEWTAP9  [PETAL-LONG-1-2SIDE]  70.4,99.2 335.5 top
U$141  SEWTAP9  [PETAL-LONG-1-2SIDE]  73.77,104.38 319.1 top
U$142  SEWTAP9  [PETAL-LONG-1-2SIDE]  78.44,108.43 302.7 top
U$143  SEWTAP9  [PETAL-LONG-1-2SIDE]  84.04,111.06 286.3 top
U$144  SEWTAP9  [PETAL-LONG-1-2SIDE]  90.17,111.87 270 top
U$145  SEWTAP9  [PETAL-LONG-1-2SIDE]  78.43,71.91 57.3 top
U$146  SEWTAP9  [PETAL-LONG-1-2SIDE]  68.65,87.07 8.2 top
U$147  SEWTAP9  [PETAL-LONG-1-2SIDE]  111.65,87.08 171.8 top
U$148  SEWTAP9  [PETAL-LONG-1-2SIDE]  166.26,93.26 188.2 top
U$149  SEWTAP9  [PETAL-LONG-1-2SIDE]  164.55,99.21 204.5 top
U$150  SEWTAP9  [PETAL-LONG-1-2SIDE]  161.18,104.38 220.9 top
U$151  SEWTAP9  [PETAL-LONG-1-2SIDE]  156.52,108.43 237.3 top
U$152  SEWTAP9  [PETAL-LONG-1-2SIDE]  150.89,111 253.7 top
U$153  SEWTAP9  [PETAL-LONG-1-2SIDE]  138.67,69.34 73.7 top
U$154  SEWTAP9  [PETAL-LONG-1-2SIDE]  144.78,68.47 90 top
U$155  SEWTAP9  [PETAL-LONG-1-2SIDE]  150.89,69.34 106.3 top
U$156  SEWTAP9  [PETAL-LONG-1-2SIDE]  156.54,71.89 122.7 top
U$157  SEWTAP9  [PETAL-LONG-1-2SIDE]  161.18,75.96 139.1 top
U$158  SEWTAP9  [PETAL-LONG-1-2SIDE]  164.52,81.15 155.5 top
U$159  SEWTAP9  [PETAL-LONG-1-2SIDE]  128.38,75.96 40.9 top
U$160  SEWTAP9  [PETAL-LONG-1-2SIDE]  125.01,81.14 24.5 top
U$161  SEWTAP9  [PETAL-LONG-1-2SIDE]  125.01,99.2 335.5 top
U$162  SEWTAP9  [PETAL-LONG-1-2SIDE]  128.38,104.38 319.1 top
U$163  SEWTAP9  [PETAL-LONG-1-2SIDE]  133.05,108.43 302.7 top
U$164  SEWTAP9  [PETAL-LONG-1-2SIDE]  138.65,111.06 286.3 top
U$165  SEWTAP9  [PETAL-LONG-1-2SIDE]  144.78,111.87 270 top
U$166  SEWTAP9  [PETAL-LONG-1-2SIDE]  133.04,71.91 57.3 top
U$167  SEWTAP9  [PETAL-LONG-1-2SIDE]  123.26,87.07 8.2 top
U$168  SEWTAP9  [PETAL-LONG-1-2SIDE]  166.26,87.08 171.8 top
U$169  SEWTAP9  [PETAL-LONG-1-2SIDE]  220.87,93.26 188.2 top
U$170  SEWTAP9  [PETAL-LONG-1-2SIDE]  219.16,99.21 204.5 top
U$171  SEWTAP9  [PETAL-LONG-1-2SIDE]  215.79,104.38 220.9 top
U$172  SEWTAP9  [PETAL-LONG-1-2SIDE]  211.13,108.43 237.3 top
U$173  SEWTAP9  [PETAL-LONG-1-2SIDE]  205.5,111 253.7 top
U$174  SEWTAP9  [PETAL-LONG-1-2SIDE]  193.28,69.34 73.7 top
U$175  SEWTAP9  [PETAL-LONG-1-2SIDE]  199.39,68.47 90 top
U$176  SEWTAP9  [PETAL-LONG-1-2SIDE]  205.5,69.34 106.3 top
U$177  SEWTAP9  [PETAL-LONG-1-2SIDE]  211.15,71.89 122.7 top
U$178  SEWTAP9  [PETAL-LONG-1-2SIDE]  215.79,75.96 139.1 top
U$179  SEWTAP9  [PETAL-LONG-1-2SIDE]  219.13,81.15 155.5 top
U$180  SEWTAP9  [PETAL-LONG-1-2SIDE]  182.99,75.96 40.9 top
U$181  SEWTAP9  [PETAL-LONG-1-2SIDE]  179.62,81.14 24.5 top
U$182  SEWTAP9  [PETAL-LONG-1-2SIDE]  179.62,99.2 335.5 top
U$183  SEWTAP9  [PETAL-LONG-1-2SIDE]  182.99,104.38 319.1 top
U$184  SEWTAP9  [PETAL-LONG-1-2SIDE]  187.66,108.43 302.7 top
U$185  SEWTAP9  [PETAL-LONG-1-2SIDE]  193.26,111.06 286.3 top
U$186  SEWTAP9  [PETAL-LONG-1-2SIDE]  199.39,111.87 270 top
U$187  SEWTAP9  [PETAL-LONG-1-2SIDE]  187.65,71.91 57.3 top
U$188  SEWTAP9  [PETAL-LONG-1-2SIDE]  177.87,87.07 8.2 top
U$189  SEWTAP9  [PETAL-LONG-1-2SIDE]  220.87,87.08 171.8 top
U$190  SEWTAP9  [PETAL-LONG-1-2SIDE]  275.48,93.26 188.2 top
U$191  SEWTAP9  [PETAL-LONG-1-2SIDE]  273.77,99.21 204.5 top
U$192  SEWTAP9  [PETAL-LONG-1-2SIDE]  270.4,104.38 220.9 top
U$193  SEWTAP9  [PETAL-LONG-1-2SIDE]  265.74,108.43 237.3 top
U$194  SEWTAP9  [PETAL-LONG-1-2SIDE]  260.11,111 253.7 top
U$195  SEWTAP9  [PETAL-LONG-1-2SIDE]  247.89,69.34 73.7 top
U$196  SEWTAP9  [PETAL-LONG-1-2SIDE]  254,68.47 90 top
U$197  SEWTAP9  [PETAL-LONG-1-2SIDE]  260.11,69.34 106.3 top
U$198  SEWTAP9  [PETAL-LONG-1-2SIDE]  265.76,71.89 122.7 top
U$199  SEWTAP9  [PETAL-LONG-1-2SIDE]  270.4,75.96 139.1 top
U$200  SEWTAP9  [PETAL-LONG-1-2SIDE]  273.74,81.15 155.5 top
U$201  SEWTAP9  [PETAL-LONG-1-2SIDE]  237.6,75.96 40.9 top
U$202  SEWTAP9  [PETAL-LONG-1-2SIDE]  234.23,81.14 24.5 top
U$203  SEWTAP9  [PETAL-LONG-1-2SIDE]  234.23,99.2 335.5 top
U$204  SEWTAP9  [PETAL-LONG-1-2SIDE]  237.6,104.38 319.1 top
U$205  SEWTAP9  [PETAL-LONG-1-2SIDE]  242.27,108.43 302.7 top
U$206  SEWTAP9  [PETAL-LONG-1-2SIDE]  247.87,111.06 286.3 top
U$207  SEWTAP9  [PETAL-LONG-1-2SIDE]  254,111.87 270 top
U$208  SEWTAP9  [PETAL-LONG-1-2SIDE]  242.26,71.91 57.3 top
U$209  SEWTAP9  [PETAL-LONG-1-2SIDE]  232.48,87.07 8.2 top
U$210  SEWTAP9  [PETAL-LONG-1-2SIDE]  275.48,87.08 171.8 top
Y1  8MHZ  [RESONATOR-SMD]  29.69,30.56 270 top
Y2  8MHZ  [RESONATOR-SMD]  84.3,30.56 270 top
Y3  8MHZ  [RESONATOR-SMD]  138.91,30.56 270 top
Y4  8MHZ  [RESONATOR-SMD]  193.52,30.56 270 top
Y5  8MHZ  [RESONATOR-SMD]  248.13,30.56 270 top
Y6  8MHZ  [RESONATOR-SMD]  29.69,85.17 270 top
Y7  8MHZ  [RESONATOR-SMD]  84.3,85.17 270 top
Y8  8MHZ  [RESONATOR-SMD]  138.91,85.17 270 top
Y9  8MHZ  [RESONATOR-SMD]  193.52,85.17 270 top
Y10  8MHZ  [RESONATOR-SMD]  248.13,85.17 270 top

## Library data of the parts
$0000001-$0000009 $0000010 GND GND1-GND9 U$1-U$210 = LilyPad-Wearables
C1 C4 C5 C8 C9 C12 C13 C16 C17 C20 C21 C24 C25 C28 C29 C32 C33 C36 C37 C40 = SparkFun-Capacitors; PROD_ID: CAP-00810
C2 C6 C10 C14 C18 C22 C26 C30 C34 C38 = SparkFun-Capacitors; PROD_ID: CAP-08310
C3 C7 C11 C15 C19 C23 C27 C31 C35 C39 = SparkFun-Capacitors; PROD_ID: CAP-00868
D1-D10 = SparkFun-LED; PROD_ID: DIO-08575
E$1 = SparkFun-Retired
E$7 E$8 FID1-FID20 LOGO1-LOGO20 = SparkFun-Aesthetics
JP1 JP4 JP6 JP8 JP10 JP12 JP14 JP16 JP18 JP20 = SparkFun-Connectors; PROD_ID: CONN-08971
JP2 JP3 JP5 JP7 JP9 JP11 JP13 JP15 JP17 JP19 = SparkFun-Connectors
R1 R4 R6 R8 R10 R12 R14 R16 R18 R20 = SparkFun-Resistors; PROD_ID: RES-00824
R2 R3 R5 R7 R9 R11 R13 R15 R17 R19 = SparkFun-Resistors; PROD_ID: RES-00818
S1-S10 = SparkFun-Electromechanical; PROD_ID: SWCH-08247
U1-U10 = SparkFun-DigitalIC; PROD_ID: IC-09069
Y1-Y10 = SparkFun-FreqCtrl; PROD_ID: XTAL-08895

## Nets
A0: U1.23 U$1.1
A1: U1.24 U$2.1
A2: U1.25 U$3.1
A3: U1.26 U$4.1
A4: U1.27 U$5.1
A5: U1.28 U$6.1
A6: U2.23 U$42.1
A7: U2.24 U$22.1
A8: U2.25 U$23.1
A9: U2.26 U$24.1
A10: U2.27 U$25.1
A11: U2.28 U$26.1
A12: U3.23 U$63.1
A13: U3.24 U$43.1
A14: U3.25 U$44.1
A15: U3.26 U$45.1
A16: U3.27 U$46.1
A17: U3.28 U$47.1
A18: U4.23 U$84.1
A19: U4.24 U$64.1
A20: U4.25 U$65.1
A21: U4.26 U$66.1
A22: U4.27 U$67.1
A23: U4.28 U$68.1
A24: U5.23 U$105.1
A25: U5.24 U$85.1
A26: U5.25 U$86.1
A27: U5.26 U$87.1
A28: U5.27 U$88.1
A29: U5.28 U$89.1
A30: U6.23 U$126.1
A31: U6.24 U$106.1
A32: U6.25 U$107.1
A33: U6.26 U$108.1
A34: U6.27 U$109.1
A35: U6.28 U$110.1
A36: U7.23 U$147.1
A37: U7.24 U$127.1
A38: U7.25 U$128.1
A39: U7.26 U$129.1
A40: U7.27 U$130.1
A41: U7.28 U$131.1
A42: U8.23 U$168.1
A43: U8.24 U$148.1
A44: U8.25 U$149.1
A45: U8.26 U$150.1
A46: U8.27 U$151.1
A47: U8.28 U$152.1
A48: U9.23 U$189.1
A49: U9.24 U$169.1
A50: U9.25 U$170.1
A51: U9.26 U$171.1
A52: U9.27 U$172.1
A53: U9.28 U$173.1
A54: U10.23 U$210.1
A55: U10.24 U$190.1
A56: U10.25 U$191.1
A57: U10.26 U$192.1
A58: U10.27 U$193.1
A59: U10.28 U$194.1
D1: U2.32 U$37.1
D2: U1.32 U$9.1
D3: U1.1 U$10.1
D4: U1.2 U$11.1
D5: U1.9 U$12.1
D6: U1.10 U$13.1
D7: U1.11 U$14.1
D8: U1.12 U$15.1
D9: U1.13 U$16.1
D10: U1.14 U$17.1
D11: U2.1 U$36.1
D12: U2.2 U$35.1
D13: U2.9 U$34.1
D14: U2.10 U$33.1
D15: U2.12 U$27.1
D16: U2.14 U$29.1
D17: U2.11 U$40.1
D18: U2.13 U$28.1
D19: U3.32 U$58.1
D20: U3.1 U$57.1
D21: U3.2 U$56.1
D22: U3.9 U$55.1
D23: U3.10 U$54.1
D24: U3.12 U$48.1
D25: U3.14 U$50.1
D26: U3.11 U$61.1
D27: U3.13 U$49.1
D28: U4.32 U$79.1
D29: U4.1 U$78.1
D30: U4.2 U$77.1
D31: U4.9 U$76.1
D32: U4.10 U$75.1
D33: U4.12 U$69.1
D34: U4.14 U$71.1
D35: U4.11 U$82.1
D36: U4.13 U$70.1
D37: U5.32 U$100.1
D38: U5.1 U$99.1
D39: U5.2 U$98.1
D40: U5.9 U$97.1
D41: U5.10 U$96.1
D42: U5.12 U$90.1
D43: U5.14 U$92.1
D44: U5.11 U$103.1
D45: U5.13 U$91.1
D46: U6.32 U$121.1
D47: U6.1 U$120.1
D48: U6.2 U$119.1
D49: U6.9 U$118.1
D50: U6.10 U$117.1
D51: U6.12 U$111.1
D52: U6.14 U$113.1
D53: U6.11 U$124.1
D54: U6.13 U$112.1
D55: U7.32 U$142.1
D56: U7.1 U$141.1
D57: U7.2 U$140.1
D58: U7.9 U$139.1
D59: U7.10 U$138.1
D60: U7.12 U$132.1
D61: U7.14 U$134.1
D62: U7.11 U$145.1
D63: U7.13 U$133.1
D64: U8.32 U$163.1
D65: U8.1 U$162.1
D66: U8.2 U$161.1
D67: U8.9 U$160.1
D68: U8.10 U$159.1
D69: U8.12 U$153.1
D70: U8.14 U$155.1
D71: U8.11 U$166.1
D72: U8.13 U$154.1
D73: U9.32 U$184.1
D74: U9.1 U$183.1
D75: U9.2 U$182.1
D76: U9.9 U$181.1
D77: U9.10 U$180.1
D78: U9.12 U$174.1
D79: U9.14 U$176.1
D80: U9.11 U$187.1
D81: U9.13 U$175.1
D82: U10.32 U$205.1
D83: U10.1 U$204.1
D84: U10.2 U$203.1
D85: U10.9 U$202.1
D86: U10.10 U$201.1
D87: U10.12 U$195.1
D88: U10.14 U$197.1
D89: U10.11 U$208.1
D90: U10.13 U$196.1
DTR: C1.1 JP1.1
DTR1: C8.1 JP4.1
DTR2: C12.1 JP6.1
DTR3: C16.1 JP8.1
DTR4: C20.1 JP10.1
DTR5: C24.1 JP12.1
DTR6: C28.1 JP14.1
DTR7: C32.1 JP16.1
DTR8: C36.1 JP18.1
DTR9: C40.1 JP20.1
GND [VCC]: C2.C C3.2 C4.2 D1.C GND.1 JP1.5 JP1.6 JP3.6 S1.1 S1.2 U1.3 U1.5 U1.21 Y1.2
GND1 [VCC]: C5.2 C6.C C7.2 D2.C GND1.1 JP2.6 JP4.5 JP4.6 S2.1 S2.2 U2.3 U2.5 U2.21 Y2.2
GND2 [VCC]: C9.2 C10.C C11.2 D3.C GND2.1 JP5.6 JP6.5 JP6.6 S3.1 S3.2 U3.3 U3.5 U3.21 Y3.2
GND3 [VCC]: C13.2 C14.C C15.2 D4.C GND3.1 JP7.6 JP8.5 JP8.6 S4.1 S4.2 U4.3 U4.5 U4.21 Y4.2
GND4 [VCC]: C17.2 C18.C C19.2 D5.C GND4.1 JP9.6 JP10.5 JP10.6 S5.1 S5.2 U5.3 U5.5 U5.21 Y5.2
GND5 [VCC]: C21.2 C22.C C23.2 D6.C GND5.1 JP11.6 JP12.5 JP12.6 S6.1 S6.2 U6.3 U6.5 U6.21 Y6.2
GND6 [VCC]: C25.2 C26.C C27.2 D7.C GND6.1 JP13.6 JP14.5 JP14.6 S7.1 S7.2 U7.3 U7.5 U7.21 Y7.2
GND7 [VCC]: C29.2 C30.C C31.2 D8.C GND7.1 JP15.6 JP16.5 JP16.6 S8.1 S8.2 U8.3 U8.5 U8.21 Y8.2
GND8 [VCC]: C33.2 C34.C C35.2 D9.C GND8.1 JP17.6 JP18.5 JP18.6 S9.1 S9.2 U9.3 U9.5 U9.21 Y9.2
GND9 [VCC]: C37.2 C38.C C39.2 D10.C GND9.1 JP19.6 JP20.5 JP20.6 S10.1 S10.2 U10.3 U10.5 U10.21 Y10.2
MISO: JP3.1 U1.16 U$19.1
MISO1: JP2.1 U2.16 U$31.1
MISO2: JP5.1 U3.16 U$52.1
MISO3: JP7.1 U4.16 U$73.1
MISO4: JP9.1 U5.16 U$94.1
MISO5: JP11.1 U6.16 U$115.1
MISO6: JP13.1 U7.16 U$136.1
MISO7: JP15.1 U8.16 U$157.1
MISO8: JP17.1 U9.16 U$178.1
MISO9: JP19.1 U10.16 U$199.1
MOSI: JP3.4 U1.15 U$18.1
MOSI1: JP2.4 U2.15 U$30.1
MOSI2: JP5.4 U3.15 U$51.1
MOSI3: JP7.4 U4.15 U$72.1
MOSI4: JP9.4 U5.15 U$93.1
MOSI5: JP11.4 U6.15 U$114.1
MOSI6: JP13.4 U7.15 U$135.1
MOSI7: JP15.4 U8.15 U$156.1
MOSI8: JP17.4 U9.15 U$177.1
MOSI9: JP19.4 U10.15 U$198.1
N$1: U1.7 Y1.1
N$2: D1.A R2.1
N$3: U1.8 Y1.3
N$4: D2.A R3.1
N$5: U2.7 Y2.1
N$6: U2.8 Y2.3
N$7: D3.A R5.1
N$8: U3.7 Y3.1
N$9: U3.8 Y3.3
N$10: D4.A R7.1
N$11: U4.7 Y4.1
N$12: U4.8 Y4.3
N$13: D5.A R9.1
N$14: U5.7 Y5.1
N$15: U5.8 Y5.3
N$16: D6.A R11.1
N$17: U6.7 Y6.1
N$18: U6.8 Y6.3
N$19: D7.A R13.1
N$20: U7.7 Y7.1
N$21: U7.8 Y7.3
N$22: D8.A R15.1
N$23: U8.7 Y8.1
N$24: U8.8 Y8.3
N$25: D9.A R17.1
N$26: U9.7 Y9.1
N$27: U9.8 Y9.3
N$28: D10.A R19.1
N$29: U10.7 Y10.1
N$30: U10.8 Y10.3
RST: C1.2 JP3.5 R1.1 S1.3 S1.4 U1.29
RST1: C8.2 JP2.5 R4.1 S2.3 S2.4 U2.29
RST2: C12.2 JP5.5 R6.1 S3.3 S3.4 U3.29
RST3: C16.2 JP7.5 R8.1 S4.3 S4.4 U4.29
RST4: C20.2 JP9.5 R10.1 S5.3 S5.4 U5.29
RST5: C24.2 JP11.5 R12.1 S6.3 S6.4 U6.29
RST6: C28.2 JP13.5 R14.1 S7.3 S7.4 U7.29
RST7: C32.2 JP15.5 R16.1 S8.3 S8.4 U8.29
RST8: C36.2 JP17.5 R18.1 S9.3 S9.4 U9.29
RST9: C40.2 JP19.5 R20.1 S10.3 S10.4 U10.29
RXI: JP1.3 U1.30 U$7.1
RXI1: JP4.3 U2.30 U$39.1
RXI2: JP6.3 U3.30 U$60.1
RXI3: JP8.3 U4.30 U$81.1
RXI4: JP10.3 U5.30 U$102.1
RXI5: JP12.3 U6.30 U$123.1
RXI6: JP14.3 U7.30 U$144.1
RXI7: JP16.3 U8.30 U$165.1
RXI8: JP18.3 U9.30 U$186.1
RXI9: JP20.3 U10.30 U$207.1
SCK: JP3.3 R2.2 U1.17 U$21.1
SCK1: JP2.3 R3.2 U2.17 U$32.1
SCK2: JP5.3 R5.2 U3.17 U$53.1
SCK3: JP7.3 R7.2 U4.17 U$74.1
SCK4: JP9.3 R9.2 U5.17 U$95.1
SCK5: JP11.3 R11.2 U6.17 U$116.1
SCK6: JP13.3 R13.2 U7.17 U$137.1
SCK7: JP15.3 R15.2 U8.17 U$158.1
SCK8: JP17.3 R17.2 U9.17 U$179.1
SCK9: JP19.3 R19.2 U10.17 U$200.1
TXO: JP1.2 U1.31 U$8.1
TXO1: JP4.2 U2.31 U$38.1
TXO2: JP6.2 U3.31 U$59.1
TXO3: JP8.2 U4.31 U$80.1
TXO4: JP10.2 U5.31 U$101.1
TXO5: JP12.2 U6.31 U$122.1
TXO6: JP14.2 U7.31 U$143.1
TXO7: JP16.2 U8.31 U$164.1
TXO8: JP18.2 U9.31 U$185.1
TXO9: JP20.2 U10.31 U$206.1
VCC [VCC]: C2.A C3.1 C4.1 JP1.4 JP3.2 R1.2 U1.4 U1.6 U1.18 U1.20 U$20.1
VCC1 [VCC]: C5.1 C6.A C7.1 JP2.2 JP4.4 R4.2 U2.4 U2.6 U2.18 U2.20 U$41.1
VCC2 [VCC]: C9.1 C10.A C11.1 JP5.2 JP6.4 R6.2 U3.4 U3.6 U3.18 U3.20 U$62.1
VCC3 [VCC]: C13.1 C14.A C15.1 JP7.2 JP8.4 R8.2 U4.4 U4.6 U4.18 U4.20 U$83.1
VCC4 [VCC]: C17.1 C18.A C19.1 JP9.2 JP10.4 R10.2 U5.4 U5.6 U5.18 U5.20 U$104.1
VCC5 [VCC]: C21.1 C22.A C23.1 JP11.2 JP12.4 R12.2 U6.4 U6.6 U6.18 U6.20 U$125.1
VCC6 [VCC]: C25.1 C26.A C27.1 JP13.2 JP14.4 R14.2 U7.4 U7.6 U7.18 U7.20 U$146.1
VCC7 [VCC]: C29.1 C30.A C31.1 JP15.2 JP16.4 R16.2 U8.4 U8.6 U8.18 U8.20 U$167.1
VCC8 [VCC]: C33.1 C34.A C35.1 JP17.2 JP18.4 R18.2 U9.4 U9.6 U9.18 U9.20 U$188.1
VCC9 [VCC]: C37.1 C38.A C39.1 JP19.2 JP20.4 R20.2 U10.4 U10.6 U10.18 U10.20 U$209.1

## Tracks (layer width: path | path; a pad name or v marks a point on that pad's centre or on a via)
A0  (via drill 0.51)
  Top 0.203: U1.23 42.45,37.56 v43.18,36.83
  Bottom 0.203: v43.18,36.83 43.94,36.83 44.96,35.81 50.29,35.81 53.63,32.47 U$1.1
A1
  Top 0.305: U$2.1 52.39,37.98 52.38,37.98 52.36,37.96 51.46,38.86 45.34,38.86 44.84,38.36 U1.24
A2
  Top 0.305: U$3.1 51.06,42.66 51.06,42.67 51.05,42.67 48.39,40.01 44.83,40.01 44.2,39.37 40.13,39.37 39.65,39.85 U1.25
A3
  Top 0.305: U1.26 37.56,40.61 38.1,41.15 38.1,43.94 38.86,44.7 46.35,44.7 48.39,46.61 U$4.1
A4  (via drill 0.51)
  Top 0.305: U$5.1 44.76,49.86 44.76,49.84 v43.18,48.26 | U1.27 36.76,38.68 37.21,38.23 v38.23,38.23
  Bottom 0.305: v38.23,38.23 40.77,38.23 43.18,40.64 v43.18,48.26
A5  (via drill 0.51)
  Top 0.305: U$6.1 40.36,51.96 40.36,51.92 35.56,47.12 v35.56,46.99 | U1.28 35.96,38.12 v35.69,37.85
  Bottom 0.305: v35.56,46.99 33.4,44.83 33.4,40.13 v35.69,37.85
A6  (via drill 0.51)
  Top 0.203: U2.23 97.06,37.56 v97.79,36.83
  Bottom 0.203: v97.79,36.83 98.55,36.83 99.57,35.81 104.9,35.81 108.24,32.47 U$42.1
A7
  Top 0.305: U$22.1 107,37.98 106.99,37.98 106.97,37.96 106.07,38.86 99.95,38.86 99.45,38.36 U2.24
A8
  Top 0.305: U$23.1 105.67,42.66 105.67,42.67 105.66,42.67 103,40.01 99.44,40.01 98.81,39.37 94.74,39.37 94.26,39.85 U2.25
A9
  Top 0.305: U2.26 92.17,40.61 92.71,41.15 92.71,43.94 93.47,44.7 100.97,44.7 103,46.61 U$24.1
A10  (via drill 0.51)
  Top 0.305: U$25.1 99.37,49.86 99.37,49.84 v97.79,48.26 | U2.27 91.37,38.68 91.82,38.23 v92.84,38.23
  Bottom 0.305: v92.84,38.23 95.38,38.23 97.79,40.64 v97.79,48.26
A11  (via drill 0.51)
  Top 0.305: U$26.1 94.97,51.96 94.97,51.92 90.17,47.12 v90.17,46.99 | U2.28 90.57,38.12 v90.3,37.85
  Bottom 0.305: v90.17,46.99 88.01,44.83 88.01,40.13 v90.3,37.85
A12  (via drill 0.51)
  Top 0.203: U3.23 151.67,37.56 v152.4,36.83
  Bottom 0.203: v152.4,36.83 153.16,36.83 154.18,35.81 159.51,35.81 162.85,32.47 U$63.1
A13
  Top 0.305: U$43.1 161.61,37.98 161.6,37.98 161.58,37.96 160.68,38.86 154.56,38.86 154.06,38.36 U3.24
A14
  Top 0.305: U$44.1 160.28,42.66 160.28,42.67 160.27,42.67 157.61,40.01 154.05,40.01 153.42,39.37 149.35,39.37 148.87,39.85 U3.25
A15
  Top 0.305: U3.26 146.78,40.61 147.32,41.15 147.32,43.94 148.08,44.7 155.57,44.7 157.61,46.61 U$45.1
A16  (via drill 0.51)
  Top 0.305: U$46.1 153.98,49.86 153.98,49.84 v152.4,48.26 | U3.27 145.98,38.68 146.43,38.23 v147.45,38.23
  Bottom 0.305: v147.45,38.23 149.99,38.23 152.4,40.64 v152.4,48.26
A17  (via drill 0.51)
  Top 0.305: U$47.1 149.58,51.96 149.58,51.92 144.78,47.12 v144.78,46.99 | U3.28 145.18,38.12 v144.91,37.85
  Bottom 0.305: v144.78,46.99 142.62,44.83 142.62,40.13 v144.91,37.85
A18  (via drill 0.51)
  Top 0.203: U4.23 206.28,37.56 v207.01,36.83
  Bottom 0.203: v207.01,36.83 207.77,36.83 208.79,35.81 214.12,35.81 217.46,32.47 U$84.1
A19
  Top 0.305: U$64.1 216.22,37.98 216.21,37.98 216.19,37.96 215.29,38.86 209.17,38.86 208.67,38.36 U4.24
A20
  Top 0.305: U$65.1 214.89,42.66 214.89,42.67 214.88,42.67 212.22,40.01 208.66,40.01 208.03,39.37 203.96,39.37 203.48,39.85 U4.25
A21
  Top 0.305: U4.26 201.39,40.61 201.93,41.15 201.93,43.94 202.69,44.7 210.19,44.7 212.22,46.61 U$66.1
A22  (via drill 0.51)
  Top 0.305: U$67.1 208.59,49.86 208.59,49.84 v207.01,48.26 | U4.27 200.59,38.68 201.04,38.23 v202.06,38.23
  Bottom 0.305: v202.06,38.23 204.6,38.23 207.01,40.64 v207.01,48.26
A23  (via drill 0.51)
  Top 0.305: U$68.1 204.19,51.96 204.19,51.92 199.39,47.12 v199.39,46.99 | U4.28 199.79,38.12 v199.52,37.85
  Bottom 0.305: v199.39,46.99 197.23,44.83 197.23,40.13 v199.52,37.85
A24  (via drill 0.51)
  Top 0.203: U5.23 260.89,37.56 v261.62,36.83
  Bottom 0.203: v261.62,36.83 262.38,36.83 263.4,35.81 268.73,35.81 272.07,32.47 U$105.1
A25
  Top 0.305: U$85.1 270.83,37.98 270.82,37.98 270.8,37.96 269.9,38.86 263.78,38.86 263.28,38.36 U5.24
A26
  Top 0.305: U$86.1 269.5,42.66 269.5,42.67 269.49,42.67 266.83,40.01 263.27,40.01 262.64,39.37 258.57,39.37 258.09,39.85 U5.25
A27
  Top 0.305: U5.26 256,40.61 256.54,41.15 256.54,43.94 257.3,44.7 264.8,44.7 266.83,46.61 U$87.1
A28  (via drill 0.51)
  Top 0.305: U$88.1 263.2,49.86 263.2,49.84 v261.62,48.26 | U5.27 255.2,38.68 255.65,38.23 v256.67,38.23
  Bottom 0.305: v256.67,38.23 259.21,38.23 261.62,40.64 v261.62,48.26
A29  (via drill 0.51)
  Top 0.305: U$89.1 258.8,51.96 258.8,51.92 254,47.12 v254,46.99 | U5.28 254.4,38.12 v254.13,37.85
  Bottom 0.305: v254,46.99 251.84,44.83 251.84,40.13 v254.13,37.85
A30  (via drill 0.51)
  Top 0.203: U6.23 42.45,92.17 v43.18,91.44
  Bottom 0.203: v43.18,91.44 43.94,91.44 44.96,90.42 50.29,90.42 53.63,87.08 U$126.1
A31
  Top 0.305: U$106.1 52.39,92.59 52.38,92.59 52.36,92.57 51.46,93.47 45.34,93.47 44.84,92.97 U6.24
A32
  Top 0.305: U$107.1 51.06,97.27 51.06,97.28 51.05,97.28 48.39,94.61 44.83,94.61 44.2,93.98 40.13,93.98 39.65,94.46 U6.25
A33
  Top 0.305: U6.26 37.56,95.22 38.1,95.76 38.1,98.55 38.86,99.31 46.35,99.31 48.39,101.22 U$108.1
A34  (via drill 0.51)
  Top 0.305: U$109.1 44.76,104.47 44.76,104.45 v43.18,102.87 | U6.27 36.76,93.29 37.21,92.84 v38.23,92.84
  Bottom 0.305: v38.23,92.84 40.77,92.84 43.18,95.25 v43.18,102.87
A35  (via drill 0.51)
  Top 0.305: U$110.1 40.36,106.57 40.36,106.53 35.56,101.73 v35.56,101.6 | U6.28 35.96,92.73 v35.69,92.46
  Bottom 0.305: v35.56,101.6 33.4,99.44 33.4,94.74 v35.69,92.46
A36  (via drill 0.51)
  Top 0.203: U7.23 97.06,92.17 v97.79,91.44
  Bottom 0.203: v97.79,91.44 98.55,91.44 99.57,90.42 104.9,90.42 108.24,87.08 U$147.1
A37
  Top 0.305: U$127.1 107,92.59 106.99,92.59 106.97,92.57 106.07,93.47 99.95,93.47 99.45,92.97 U7.24
A38
  Top 0.305: U$128.1 105.67,97.27 105.67,97.28 105.66,97.28 103,94.61 99.44,94.61 98.81,93.98 94.74,93.98 94.26,94.46 U7.25
A39
  Top 0.305: U7.26 92.17,95.22 92.71,95.76 92.71,98.55 93.47,99.31 100.97,99.31 103,101.22 U$129.1
A40  (via drill 0.51)
  Top 0.305: U$130.1 99.37,104.47 99.37,104.45 v97.79,102.87 | U7.27 91.37,93.29 91.82,92.84 v92.84,92.84
  Bottom 0.305: v92.84,92.84 95.38,92.84 97.79,95.25 v97.79,102.87
A41  (via drill 0.51)
  Top 0.305: U$131.1 94.97,106.57 94.97,106.53 90.17,101.73 v90.17,101.6 | U7.28 90.57,92.73 v90.3,92.46
  Bottom 0.305: v90.17,101.6 88.01,99.44 88.01,94.74 v90.3,92.46
A42  (via drill 0.51)
  Top 0.203: U8.23 151.67,92.17 v152.4,91.44
  Bottom 0.203: v152.4,91.44 153.16,91.44 154.18,90.42 159.51,90.42 162.85,87.08 U$168.1
A43
  Top 0.305: U$148.1 161.61,92.59 161.6,92.59 161.58,92.57 160.68,93.47 154.56,93.47 154.06,92.97 U8.24
A44
  Top 0.305: U$149.1 160.28,97.27 160.28,97.28 160.27,97.28 157.61,94.61 154.05,94.61 153.42,93.98 149.35,93.98 148.87,94.46 U8.25
A45
  Top 0.305: U8.26 146.78,95.22 147.32,95.76 147.32,98.55 148.08,99.31 155.57,99.31 157.61,101.22 U$150.1
A46  (via drill 0.51)
  Top 0.305: U$151.1 153.98,104.47 153.98,104.45 v152.4,102.87 | U8.27 145.98,93.29 146.43,92.84 v147.45,92.84
  Bottom 0.305: v147.45,92.84 149.99,92.84 152.4,95.25 v152.4,102.87
A47  (via drill 0.51)
  Top 0.305: U$152.1 149.58,106.57 149.58,106.53 144.78,101.73 v144.78,101.6 | U8.28 145.18,92.73 v144.91,92.46
  Bottom 0.305: v144.78,101.6 142.62,99.44 142.62,94.74 v144.91,92.46
A48  (via drill 0.51)
  Top 0.203: U9.23 206.28,92.17 v207.01,91.44
  Bottom 0.203: v207.01,91.44 207.77,91.44 208.79,90.42 214.12,90.42 217.46,87.08 U$189.1
A49
  Top 0.305: U$169.1 216.22,92.59 216.21,92.59 216.19,92.57 215.29,93.47 209.17,93.47 208.67,92.97 U9.24
A50
  Top 0.305: U$170.1 214.89,97.27 214.89,97.28 214.88,97.28 212.22,94.61 208.66,94.61 208.03,93.98 203.96,93.98 203.48,94.46 U9.25
A51
  Top 0.305: U9.26 201.39,95.22 201.93,95.76 201.93,98.55 202.69,99.31 210.19,99.31 212.22,101.22 U$171.1
A52  (via drill 0.51)
  Top 0.305: U$172.1 208.59,104.47 208.59,104.45 v207.01,102.87 | U9.27 200.59,93.29 201.04,92.84 v202.06,92.84
  Bottom 0.305: v202.06,92.84 204.6,92.84 207.01,95.25 v207.01,102.87
A53  (via drill 0.51)
  Top 0.305: U$173.1 204.19,106.57 204.19,106.53 199.39,101.73 v199.39,101.6 | U9.28 199.79,92.73 v199.52,92.46
  Bottom 0.305: v199.39,101.6 197.23,99.44 197.23,94.74 v199.52,92.46
A54  (via drill 0.51)
  Top 0.203: U10.23 260.89,92.17 v261.62,91.44
  Bottom 0.203: v261.62,91.44 262.38,91.44 263.4,90.42 268.73,90.42 272.07,87.08 U$210.1
A55
  Top 0.305: U$190.1 270.83,92.59 270.82,92.59 270.8,92.57 269.9,93.47 263.78,93.47 263.28,92.97 U10.24
A56
  Top 0.305: U$191.1 269.5,97.27 269.5,97.28 269.49,97.28 266.83,94.61 263.27,94.61 262.64,93.98 258.57,93.98 258.09,94.46 U10.25
A57
  Top 0.305: U10.26 256,95.22 256.54,95.76 256.54,98.55 257.3,99.31 264.8,99.31 266.83,101.22 U$192.1
A58  (via drill 0.51)
  Top 0.305: U$193.1 263.2,104.47 263.2,104.45 v261.62,102.87 | U10.27 255.2,93.29 255.65,92.84 v256.67,92.84
  Bottom 0.305: v256.67,92.84 259.21,92.84 261.62,95.25 v261.62,102.87
A59  (via drill 0.51)
  Top 0.305: U$194.1 258.8,106.57 258.8,106.53 254,101.73 v254,101.6 | U10.28 254.4,92.73 v254.13,92.46
  Bottom 0.305: v254,101.6 251.84,99.44 251.84,94.74 v254.13,92.46
D1
  Top 0.305: U$37.1 80.97,49.86 81.03,49.8 81.03,42.42 83.59,39.85 U2.32
D2
  Top 0.305: U$9.1 26.36,49.86 26.42,49.8 26.42,42.42 28.98,39.85 U1.32
D3
  Top 0.305: U$10.1 22.72,46.69 22.73,46.69 22.86,46.56 22.86,44.45 28.95,38.36 U1.1
D4
  Top 0.305: U$11.1 20.1,42.62 20.12,42.62 23.75,42.62 28.81,37.56 U1.2
D5
  Top 0.305: U$12.1 20.1,28.49 20.1,28.51 20.12,28.52 20.14,28.5 22.91,28.5 24.74,26.67 29.21,26.67 32.76,30.22 U1.9
D6
  Top 0.305: U$13.1 22.71,24.43 22.71,24.44 23.67,25.4 29.21,25.4 33.56,29.75 U1.10
D7
  Top 0.305: U$14.1 26.36,21.26 26.36,21.28 34.36,29.28 U1.11
D8
  Top 0.305: U$15.1 30.77,19.24 30.8,19.24 35.16,23.6 U1.12
D9
  Top 0.305: U$16.1 35.56,22.35 35.96,22.75 U1.13
D10
  Top 0.305: U$17.1 40.35,19.25 40.31,19.25 36.76,22.8 U1.14
D11
  Top 0.305: U$36.1 77.33,46.69 77.34,46.69 77.47,46.56 77.47,44.45 83.56,38.36 U2.1
D12
  Top 0.305: U$35.1 74.71,42.62 74.73,42.62 78.36,42.62 83.42,37.56 U2.2
D13
  Top 0.305: U$34.1 74.71,28.49 74.71,28.51 74.73,28.52 74.75,28.5 77.52,28.5 79.35,26.67 83.82,26.67 87.37,30.22 U2.9
D14
  Top 0.305: U$33.1 77.32,24.43 77.32,24.44 78.28,25.4 83.82,25.4 88.17,29.75 U2.10
D15
  Top 0.305: U$27.1 85.38,19.24 85.41,19.24 89.77,23.6 U2.12
D16
  Top 0.305: U$29.1 94.96,19.25 94.92,19.25 91.37,22.8 U2.14
D17
  Top 0.305: U$40.1 80.97,21.26 80.97,21.28 88.97,29.28 U2.11
D18
  Top 0.305: U$28.1 90.17,22.35 90.57,22.75 U2.13
D19
  Top 0.305: U$58.1 135.58,49.86 135.64,49.8 135.64,42.42 138.2,39.85 U3.32
D20
  Top 0.305: U$57.1 131.94,46.69 131.95,46.69 132.08,46.56 132.08,44.45 138.17,38.36 U3.1
D21
  Top 0.305: U$56.1 129.32,42.62 129.34,42.62 132.97,42.62 138.03,37.56 U3.2
D22
  Top 0.305: U$55.1 129.32,28.49 129.32,28.51 129.34,28.52 129.36,28.5 132.13,28.5 133.96,26.67 138.43,26.67 141.98,30.22 U3.9
D23
  Top 0.305: U$54.1 131.93,24.43 131.93,24.44 132.89,25.4 138.43,25.4 142.78,29.75 U3.10
D24
  Top 0.305: U$48.1 139.99,19.24 140.02,19.24 144.38,23.6 U3.12
D25
  Top 0.305: U$50.1 149.57,19.25 149.53,19.25 145.98,22.8 U3.14
D26
  Top 0.305: U$61.1 135.58,21.26 135.58,21.28 143.58,29.28 U3.11
D27
  Top 0.305: U$49.1 144.78,22.35 145.18,22.75 U3.13
D28
  Top 0.305: U$79.1 190.19,49.86 190.25,49.8 190.25,42.42 192.81,39.85 U4.32
D29
  Top 0.305: U$78.1 186.55,46.69 186.56,46.69 186.69,46.56 186.69,44.45 192.78,38.36 U4.1
D30
  Top 0.305: U$77.1 183.93,42.62 183.95,42.62 187.58,42.62 192.64,37.56 U4.2
D31
  Top 0.305: U$76.1 183.93,28.49 183.93,28.51 183.95,28.52 183.97,28.5 186.74,28.5 188.57,26.67 193.04,26.67 196.59,30.22 U4.9
D32
  Top 0.305: U$75.1 186.54,24.43 186.54,24.44 187.5,25.4 193.04,25.4 197.39,29.75 U4.10
D33
  Top 0.305: U$69.1 194.6,19.24 194.63,19.24 198.99,23.6 U4.12
D34
  Top 0.305: U$71.1 204.18,19.25 204.14,19.25 200.59,22.8 U4.14
D35
  Top 0.305: U$82.1 190.19,21.26 190.19,21.28 198.19,29.28 U4.11
D36
  Top 0.305: U$70.1 199.39,22.35 199.79,22.75 U4.13
D37
  Top 0.305: U$100.1 244.8,49.86 244.86,49.8 244.86,42.42 247.42,39.85 U5.32
D38
  Top 0.305: U$99.1 241.16,46.69 241.17,46.69 241.3,46.56 241.3,44.45 247.39,38.36 U5.1
D39
  Top 0.305: U$98.1 238.54,42.62 238.56,42.62 242.19,42.62 247.25,37.56 U5.2
D40
  Top 0.305: U$97.1 238.54,28.49 238.54,28.51 238.56,28.52 238.58,28.5 241.35,28.5 243.18,26.67 247.65,26.67 251.2,30.22 U5.9
D41
  Top 0.305: U$96.1 241.15,24.43 241.15,24.44 242.11,25.4 247.65,25.4 252,29.75 U5.10
D42
  Top 0.305: U$90.1 249.21,19.24 249.24,19.24 253.6,23.6 U5.12
D43
  Top 0.305: U$92.1 258.79,19.25 258.75,19.25 255.2,22.8 U5.14
D44
  Top 0.305: U$103.1 244.8,21.26 244.8,21.28 252.8,29.28 U5.11
D45
  Top 0.305: U$91.1 254,18.56 254,22.35 254.4,22.75 U5.13
D46
  Top 0.305: U$121.1 26.36,104.47 26.42,104.41 26.42,97.03 28.98,94.46 U6.32
D47
  Top 0.305: U$120.1 22.72,101.3 22.73,101.3 22.86,101.17 22.86,99.06 28.95,92.97 U6.1
D48
  Top 0.305: U$119.1 20.1,97.23 20.12,97.23 23.75,97.23 28.81,92.17 U6.2
D49
  Top 0.305: U$118.1 20.1,83.1 20.1,83.12 20.12,83.13 20.14,83.11 22.91,83.11 24.74,81.28 29.21,81.28 32.76,84.83 U6.9
D50
  Top 0.305: U$117.1 22.71,79.04 22.71,79.05 23.67,80.01 29.21,80.01 33.56,84.36 U6.10
D51
  Top 0.305: U$111.1 30.77,73.85 30.8,73.85 35.16,78.21 U6.12
D52
  Top 0.305: U$113.1 40.35,73.86 40.31,73.86 36.76,77.41 U6.14
D53
  Top 0.305: U$124.1 26.36,75.87 26.36,75.89 34.36,83.89 U6.11
D54
  Top 0.305: U$112.1 35.56,76.96 35.96,77.36 U6.13
D55
  Top 0.305: U$142.1 80.97,104.47 81.03,104.41 81.03,97.03 83.59,94.46 U7.32
D56
  Top 0.305: U$141.1 77.33,101.3 77.34,101.3 77.47,101.17 77.47,99.06 83.56,92.97 U7.1
D57
  Top 0.305: U$140.1 74.71,97.23 74.73,97.23 78.36,97.23 83.42,92.17 U7.2
D58
  Top 0.305: U$139.1 74.71,83.1 74.71,83.12 74.73,83.13 74.75,83.11 77.52,83.11 79.35,81.28 83.82,81.28 87.37,84.83 U7.9
D59
  Top 0.305: U$138.1 77.32,79.04 77.32,79.05 78.28,80.01 83.82,80.01 88.17,84.36 U7.10
D60
  Top 0.305: U$132.1 85.38,73.85 85.41,73.85 89.77,78.21 U7.12
D61
  Top 0.305: U$134.1 94.96,73.86 94.92,73.86 91.37,77.41 U7.14
D62
  Top 0.305: U$145.1 80.97,75.87 80.97,75.89 88.97,83.89 U7.11
D63
  Top 0.305: U$133.1 90.17,76.96 90.57,77.36 U7.13
D64
  Top 0.305: U$163.1 135.58,104.47 135.64,104.41 135.64,97.03 138.2,94.46 U8.32
D65
  Top 0.305: U$162.1 131.94,101.3 131.95,101.3 132.08,101.17 132.08,99.06 138.17,92.97 U8.1
D66
  Top 0.305: U$161.1 129.32,97.23 129.34,97.23 132.97,97.23 138.03,92.17 U8.2
D67
  Top 0.305: U$160.1 129.32,83.1 129.32,83.12 129.34,83.13 129.36,83.11 132.13,83.11 133.96,81.28 138.43,81.28 141.98,84.83 U8.9
D68
  Top 0.305: U$159.1 131.93,79.04 131.93,79.05 132.89,80.01 138.43,80.01 142.78,84.36 U8.10
D69
  Top 0.305: U$153.1 139.99,73.85 140.02,73.85 144.38,78.21 U8.12
D70
  Top 0.305: U$155.1 149.57,73.86 149.53,73.86 145.98,77.41 U8.14
D71
  Top 0.305: U$166.1 135.58,75.87 135.58,75.89 143.58,83.89 U8.11
D72
  Top 0.305: U$154.1 144.78,76.96 145.18,77.36 U8.13
D73
  Top 0.305: U$184.1 190.19,104.47 190.25,104.41 190.25,97.03 192.81,94.46 U9.32
D74
  Top 0.305: U$183.1 186.55,101.3 186.56,101.3 186.69,101.17 186.69,99.06 192.78,92.97 U9.1
D75
  Top 0.305: U$182.1 183.93,97.23 183.95,97.23 187.58,97.23 192.64,92.17 U9.2
D76
  Top 0.305: U$181.1 183.93,83.1 183.93,83.12 183.95,83.13 183.97,83.11 186.74,83.11 188.57,81.28 193.04,81.28 196.59,84.83 U9.9
D77
  Top 0.305: U$180.1 186.54,79.04 186.54,79.05 187.5,80.01 193.04,80.01 197.39,84.36 U9.10
D78
  Top 0.305: U$174.1 194.6,73.85 194.63,73.85 198.99,78.21 U9.12
D79
  Top 0.305: U$176.1 204.18,73.86 204.14,73.86 200.59,77.41 U9.14
D80
  Top 0.305: U$187.1 190.19,75.87 190.19,75.89 198.19,83.89 U9.11
D81
  Top 0.305: U$175.1 199.39,76.96 199.79,77.36 U9.13
D82
  Top 0.305: U$205.1 244.8,104.47 244.86,104.41 244.86,97.03 247.42,94.46 U10.32
D83
  Top 0.305: U$204.1 241.16,101.3 241.17,101.3 241.3,101.17 241.3,99.06 247.39,92.97 U10.1
D84
  Top 0.305: U$203.1 238.54,97.23 238.56,97.23 242.19,97.23 247.25,92.17 U10.2
D85
  Top 0.305: U$202.1 238.54,83.1 238.54,83.12 238.56,83.13 238.58,83.11 241.35,83.11 243.18,81.28 247.65,81.28 251.2,84.83 U10.9
D86
  Top 0.305: U$201.1 241.15,79.04 241.15,79.05 242.11,80.01 247.65,80.01 252,84.36 U10.10
D87
  Top 0.305: U$195.1 249.21,73.85 249.24,73.85 253.6,78.21 U10.12
D88
  Top 0.305: U$197.1 258.79,73.86 258.75,73.86 255.2,77.41 U10.14
D89
  Top 0.305: U$208.1 244.8,75.87 244.8,75.89 252.8,83.89 U10.11
D90
  Top 0.305: U$196.1 254,73.17 254,76.96 254.4,77.36 U10.13
DTR
  Top 0.305: JP1.1 42.69,42.56 43.54,43.41 C1.1
DTR1
  Top 0.305: JP4.1 97.3,42.56 98.15,43.41 C8.1
DTR2
  Top 0.305: JP6.1 151.91,42.56 152.76,43.41 C12.1
DTR3
  Top 0.305: JP8.1 206.52,42.56 207.37,43.41 C16.1
DTR4
  Top 0.305: JP10.1 261.13,42.56 261.98,43.41 C20.1
DTR5